# Altium PCB 400148.PcbDoc
Units mm, origin at the board's own origin, x right, y up, seen from the top; angles counter-clockwise.
Board outline 21.21 x 58.85 mm, 2 copper layers (Top Layer, Bottom Layer), stack 0.11 mm thick; 1 components, 1 nets, 0 pads, 2 vias.
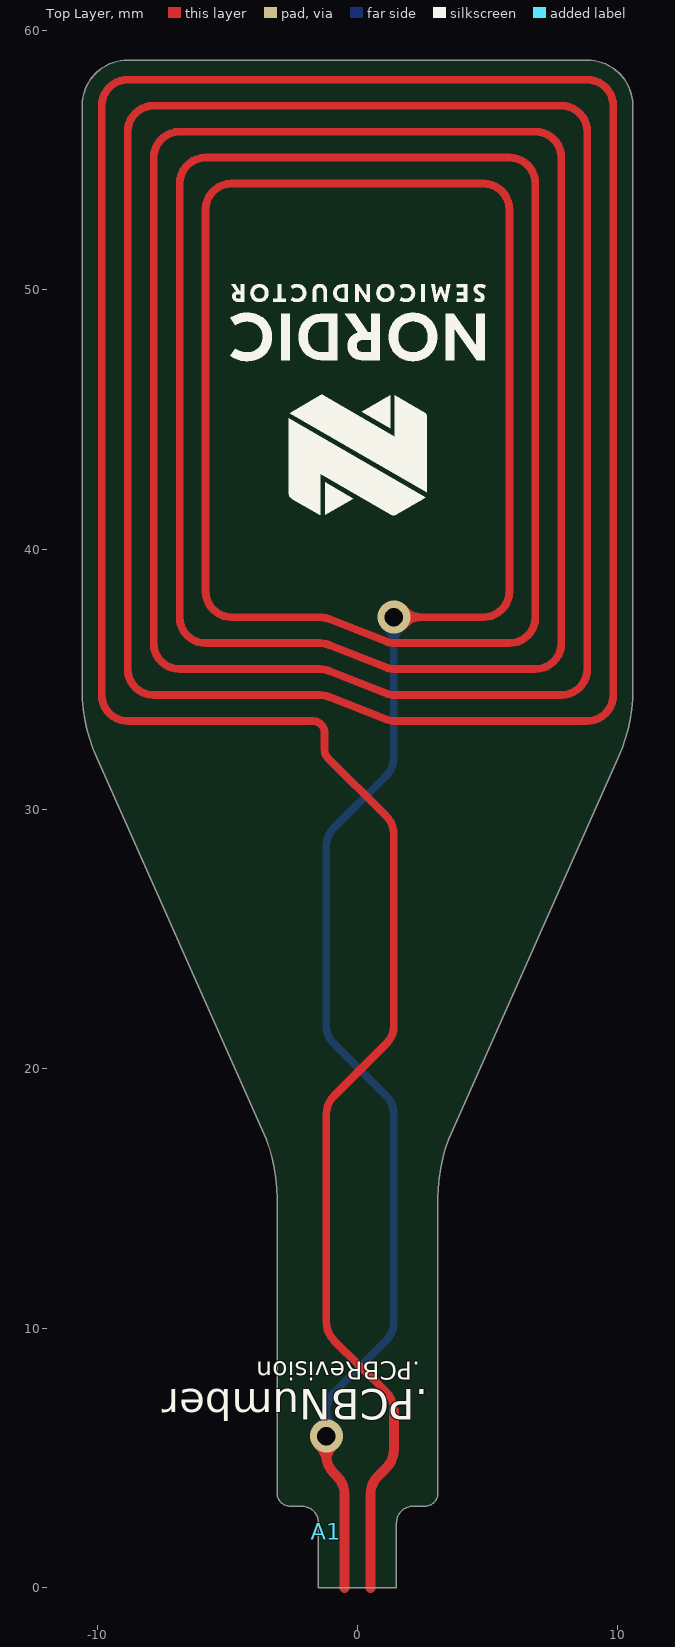
[diagram p0: Top Layer view]
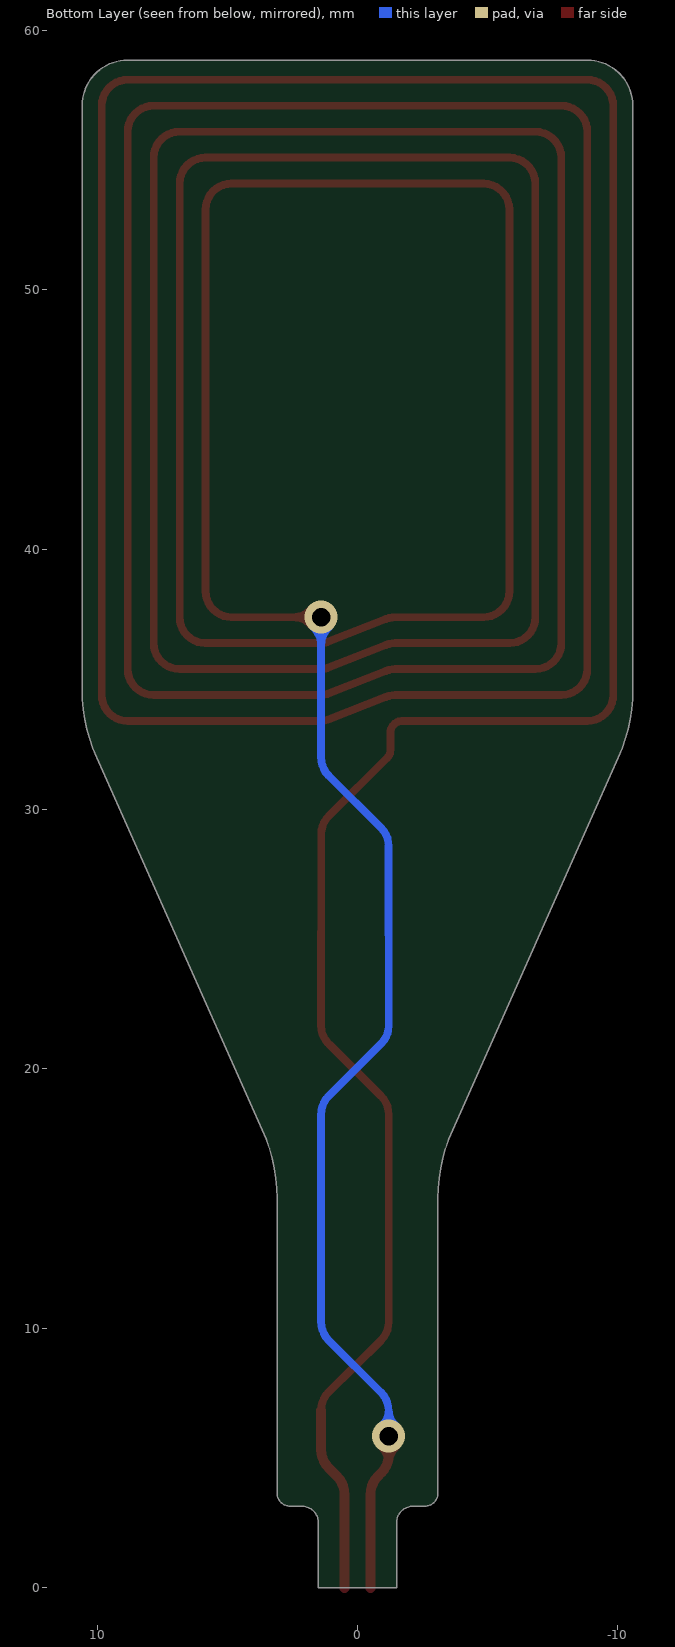
[diagram p1: Bottom Layer view, seen from below]

## Layer stack, top to bottom
Top Solder: solder mask 0.0102, Solder Resist, Dk 3.5
Top Layer: signal copper 0.03
Dielectric1: core 0.05, Polyimide (Flex), IPC-4204/1, Dk 4.8
Bottom Layer: signal copper 0.03
Bottom Solder: solder mask 0.0102, Solder Resist, Dk 3.5

## Board outline
-2.6,3.15 cw(c-2.6,3.65) -3.1,3.65 -3.1,15 ccw(c-9.6,15) -3.662,17.644 -10.045,31.98 cw(c-4.107,34.624) -10.607,34.624 -10.607,57.089 cw(c-8.85,57.089) -8.851,58.845 8.851,58.845 cw(c8.851,57.089) 10.607,57.089 10.607,34.624 cw(c4.107,34.624) 10.045,31.98 3.662,17.644 ccw(c9.6,15) 3.1,15 3.1,3.65 cw(c2.6,3.65) 2.6,3.15 2.153,3.15 ccw(c2.153,2.5) 1.503,2.5 1.503,0 -1.503,0 -1.503,2.5 ccw(c-2.153,2.5) -2.153,3.15

## Design rules (kind name [scope] priority, off if disabled: settings)
Clearance ANT_Clerance [InNet('ANT')] p1: gap=0.127 ignorepadtopadclearanceinfootprint=FALSE except(0: Arc-Hole Track-Hole SMDPad-Hole THPad-Hole Via-Hole Fill-Hole Poly-Hole Region-Hole Text-Hole)
Clearance Polygon_Clearance [(InNamedPolygon('Top_Layer-GND')) or (InNamedPolygon('Bottom_Layer-GND'))] p2: gap=0.254 ignorepadtopadclearanceinfootprint=FALSE except(0: Arc-Hole Track-Hole SMDPad-Hole THPad-Hole Via-Hole Fill-Hole Poly-Hole Region-Hole Text-Hole)
Clearance [All] p3: gap=0.152 ignorepadtopadclearanceinfootprint=FALSE except(0: Arc-Hole Track-Hole SMDPad-Hole THPad-Hole Via-Hole Fill-Hole Poly-Hole Region-Hole Text-Hole)
ComponentClearance [All] p1 off: gap=0.254 collisioncheckmode=3 verticalgap=0.254 showdistances=FALSE
DiffPairsRouting [All] p1: maxlimit=0.15 minlimit=0.15 mostfreqgap=0.15 toplayer_minwidth=0.381 toplayer_maxwidth=0.381 toplayer_prefwidth=0.381 bottomlayer_minwidth=0.381 bottomlayer_maxwidth=0.381 bottomlayer_prefwidth=0.381 substack1={64A68C17-672D-4B89-A132-CB50C114D1B8} toplayer_{64a68c17-672d-4b89-a132-cb50c114d1b8}_minwidth=0.381 toplayer_{64a68c17-672d-4b89-a132-cb50c114d1b8}_maxwidth=0.381 toplayer_{64a68c17-672d-4b89-a132-cb50c114d1b8}_prefwidth=0.381 bottomlayer_{64a68c17-672d-4b89-a132-cb50c114d1b8}_minwidth=0.381 bottomlayer_{64a68c17-672d-4b89-a132-cb50c114d1b8}_maxwidth=0.381 bottomlayer_{64a68c17-672d-4b89-a132-cb50c114d1b8}_prefwidth=0.381 maxuncoupledlength=12.7
FabricationTestPointUsage TestPointUsage [All] p1: valid=0 allowmultiple=FALSE
FabricationTestpoint Testpoint [All] p1: side=3 testpointundercomponent=TRUE minsize=1.016 maxsize=2.54 preferedsize=1.524 minholesize=0 maxholesize=1.016 preferedholesize=0.813 testpointgrid=0.025 allowsidetop=TRUE allowsidebottom=TRUE usegrid=TRUE gridtolerance=0
Height [All] p1 off: minheight=0 maxheight=25.4 prefheight=12.7
HoleSize [All] p1: absolutevalues=TRUE maxlimit=5 minlimit=0.305 maxpercent=80.000 minpercent=20.000
MinimumAnnularRing [All] p1 off: minimumring=0.152
PolygonConnect PolygonConnect_1 [isVia and innet(gnd)] p1: connectstyle=Direct reliefconductorwidth=0.254 reliefentries=4 polygonreliefangle="90 Angle" airgapwidth=0.254
PolygonConnect [All] p2: connectstyle=Relief reliefconductorwidth=0.254 reliefentries=4 polygonreliefangle="90 Angle" airgapwidth=0.254
RoutingVias [All] p1: holewidth=0.305 width=0.61 viastyle="Through Hole" minholewidth=0.305 minwidth=0.61 maxholewidth=0.711 maxwidth=1.27
ShortCircuit ShortCircuit_1 [All] p1: allowed=FALSE
ShortCircuit [InNet('N') vs InNet('P')] p2: allowed=TRUE
SilkToSolderMaskClearance SilkscreenOverComponentPads [IsPad] p1: minsilkscreentomaskgap=0.254 clearancetoexposedcopper=TRUE
SolderMaskExpansion [All] p1: expansion=0.076 istentingtop=FALSE
Width [All] p1: maxlimit=2.54 minlimit=0.152 preferedwidth=0.152 substack1={64A68C17-672D-4B89-A132-CB50C114D1B8}
22 further rules are at their usual default settings.

## Components (designator, comment, footprint, x,y, rotation, side; value= is the part's Value field where it differs from the comment)
A1 "NFC_ANT_Listener-6" NFC_ANT_Listener-6 -1.205,2.159 r90 top

## Footprints (in the part's own frame and the unit in brackets; to place one, negate y for a bottom-side part, rotate by r counter-clockwise, add the part's x,y. Pads: shape width x height; smd on the part's side, far side on the other; paste and mask are expansions set on the pad)
NFC_ANT_Listener-6 [mm]
  Top Layer lines w0.3: 51.93,3.644 ccw(c50.93,3.644) 50.93,4.644 ; 51.93,3.644 51.93,-6.056 cw(c50.93,-6.056) 50.93,-7.056 36.23,-7.056 cw(c36.23,-6.056) 35.23,-6.056 35.23,-2.606 ; 32.157,-0.12 ccw(c31.23,0.254) 32.16,-0.112 ; 33.157,-0.12 ccw(c32.23,0.254) 33.16,-0.115 ; 34.157,-0.12 ccw(c33.23,0.254) 34.16,-0.115 ; 35.157,-0.12 ccw(c34.23,0.254) 35.16,-0.115 ; 4.68,-2.606 ccw(c4.68,-1.606) 5.387,-2.313 7.373,-0.298 cw(c8.08,-1.005) 8.08,-0.006 ; 33.23,7.644 ccw(c33.23,6.644) 32.23,6.644 32.23,0.254 cw(c31.23,0.254) 32.16,-0.112 ; 33.23,7.644 53.93,7.644 ; 33.23,7.644 33.23,7.644 ; 33.23,7.644 33.23,7.644 ; 53.93,7.644 cw(c53.93,6.644) 54.93,6.644 54.93,-9.056 cw(c53.93,-9.056) 53.93,-10.056 33.23,-10.056 ; 53.93,7.644 53.93,7.644 ; 53.93,7.644 53.93,7.644 ; 53.93,7.644 53.93,7.644 ; 52.93,6.644 ccw(c52.93,5.644) 52.93,6.644 ; 52.93,6.644 cw(c52.93,5.644) 53.93,5.644 53.93,-8.056 cw(c52.93,-8.056) 52.93,-9.056 34.23,-9.056 cw(c34.23,-8.056) 33.23,-8.056 33.23,-2.665 33.23,-2.639 33.235,-2.569 33.244,-2.5 33.258,-2.432 33.276,-2.365 33.3,-2.299 34.16,-0.115 ; 52.93,6.644 52.93,6.644 ; 52.93,6.644 34.23,6.644 ccw(c34.23,5.644) 33.23,5.644 33.23,0.254 cw(c32.23,0.254) 33.161,-0.112 ; 51.93,5.644 cw(c51.93,4.644) 51.93,5.644 ; 51.93,5.644 51.93,5.644 ; 51.93,5.644 35.23,5.644 ccw(c35.23,4.644) 34.23,4.644 34.23,0.254 cw(c33.23,0.254) 34.161,-0.112 ; 51.93,5.644 cw(c51.93,4.644) 52.93,4.644 52.93,-7.056 cw(c51.93,-7.056) 51.93,-8.056 35.23,-8.056 cw(c35.23,-7.056) 34.23,-7.056 34.23,-2.665 34.23,-2.639 34.235,-2.569 34.244,-2.5 34.258,-2.432 34.276,-2.365 34.3,-2.299 35.16,-0.115 ; 50.93,4.644 ccw(c50.93,3.644) 50.93,4.644 ; 50.93,4.644 36.23,4.644 ccw(c36.23,3.644) 35.23,3.644 35.23,0.254 cw(c34.23,0.254) 35.161,-0.112 ; 50.93,4.644 50.93,4.644 ; 8.08,-0.006 8.08,-0.006 ; 8.08,-0.006 16.08,-0.006 ; 8.08,-0.006 8.08,-0.006 ; 16.08,-0.006 cw(c16.08,-1.005) 16.787,-0.298 18.773,-2.284 18.822,-2.333 ccw(c19.48,-1.674) 19.48,-2.606 26.874,-2.601 ccw(c26.874,-1.61) 27.575,-2.31 27.63,-2.256 29.796,-0.072 ; 16.08,-0.006 16.08,-0.006 ; 16.08,-0.006 16.08,-0.006 ; 16.08,-0.006 16.08,-0.006 ; 29.796,-0.072 ccw(c30.124,-0.4) 29.796,-0.072 ; 29.796,-0.072 cw(c30.124,-0.4) 30.124,0.064 30.139,0.064 30.684,0.064 30.78,0.064 ccw(c30.78,0.514) 31.23,0.514 31.23,7.594 31.23,7.645 cw(c32.23,7.645) 32.23,8.644 54.93,8.644 cw(c54.93,7.645) 55.93,7.645 55.93,-10.056 cw(c54.93,-10.056) 54.93,-11.056 32.23,-11.056 cw(c32.23,-10.056) 31.23,-10.056 ; 29.796,-0.072 29.796,-0.072 ; 29.796,-0.072 29.796,-0.072 ; 32.161,-0.112 31.3,-2.299 31.276,-2.365 31.258,-2.432 31.244,-2.5 31.235,-2.569 31.23,-2.639 31.23,-2.665 31.23,-10.056 ; 33.161,-0.112 cw(c32.23,0.254) 33.16,-0.115 ; 33.161,-0.112 33.16,-0.115 ; 34.161,-0.112 cw(c33.23,0.254) 34.16,-0.115 ; 34.161,-0.112 34.16,-0.115 ; 35.161,-0.112 cw(c34.23,0.254) 35.16,-0.115 ; 35.161,-0.112 35.16,-0.115 ; 33.16,-0.115 cw(c32.23,0.254) 33.16,-0.115 ; 33.16,-0.115 33.16,-0.115 ; 34.16,-0.115 cw(c33.23,0.254) 34.16,-0.115 ; 34.16,-0.115 34.16,-0.115 ; 35.16,-0.115 cw(c34.23,0.254) 35.16,-0.115 ; 35.16,-0.115 35.16,-0.115 ; 33.16,-0.115 32.3,-2.299 32.276,-2.365 32.258,-2.432 32.244,-2.5 32.235,-2.569 32.23,-2.639 32.23,-2.665 32.23,-9.056 ccw(c33.23,-9.056) 33.23,-10.056 ; 31.23,-10.056 31.23,-10.056 ; 31.23,-10.056 31.23,-10.056 ; 33.23,-10.056 33.23,-10.056
  Bottom Layer lines w0.3: 3.68,-0.006 3.683,-0.006 4.652,-0.006 ; 4.656,-0.006 cw(c4.656,-1.03) 5.38,-0.306 7.373,-2.313 ccw(c8.08,-1.606) 8.08,-2.606 ; 35.23,-2.606 35.154,-2.606 29.83,-2.606 cw(c29.83,-1.606) 29.123,-2.313 27.123,-0.299 ccw(c26.416,-1.006) 26.416,-0.006 ; 26.416,-0.006 26.416,-0.006 ; 26.416,-0.006 26.416,-0.006 ; 26.416,-0.006 26.416,-0.006 ; 26.416,-0.006 19.48,-0.006 ccw(c19.48,-0.937) 18.822,-0.278 18.773,-0.327 16.787,-2.313 cw(c16.08,-1.606) 16.08,-2.606 ; 26.416,-0.006 26.416,-0.006 ; 8.08,-2.606 16.08,-2.606 ; 8.08,-2.606 8.08,-2.606 ; 16.08,-2.606 16.08,-2.606 ; 16.08,-2.606 16.08,-2.606

## Part data
A1: "NFC Antenna Listener-6"

## Via types
v1: diameter 1.27, hole 0.711, Top Layer to Bottom Layer, tented both sides, 2 vias

## Nets (pads, with @x,y where several pads share a name; then routed paths per layer and width w, separated by ;. In a path a pad name is that pad's centre, name@x,y a point inside that pad or via, vN(x,y) a via of type N, cw(c..) or ccw(c..) an arc to the next point about the centre after c; other vN are vias at no path point)
ANT:  | length 13.5
  Top Layer w0.381: v1@-1.294,5.467 v1@-1.294,5.842 ; v1@-1.205,5.842 -1.205,5.129 ccw(c-0.205,5.129) -0.912,4.422 -0.792,4.302 cw(c-1.499,3.595) -0.499,3.595 -0.5,0 ; 0.499,3.595 cw(c1.499,3.595) 0.792,4.302 1.107,4.617 ccw(c0.4,5.324) 1.4,5.324 1.4,6.839 ; 0.5,0 0.5,3.595
  other v1: -1.2,5.842 1.4,37.389

## Polygon pours and split planes (outlines as drawn)
no net on Mechanical 5 (hatched Horizontal grid 0.025 track 0.025): 1.49,0.013 -1.49,0.013 -1.49,2.54 -1.49,2.541 -1.501,2.653 -1.532,2.763 -1.58,2.865 -1.646,2.957 -1.727,3.037 -1.82,3.101 -1.923,3.149 -2.032,3.178 -2.145,3.188 -2.621,3.188 -2.629,3.186 -2.636,3.188 -2.728,3.196 -2.817,3.223 -2.898,3.266 -2.969,3.324 -3.028,3.395 -3.072,3.477 -3.099,3.565 -3.108,3.658 -3.108,4.747 3.082,4.747 3.082,3.659 3.074,3.568 3.048,3.481 3.005,3.4 2.948,3.329 2.879,3.27 2.799,3.226 2.712,3.198 2.621,3.187 2.619,3.187 2.613,3.188 2.147,3.188 2.034,3.178 1.924,3.149 1.821,3.101 1.728,3.037 1.647,2.957 1.581,2.865 1.532,2.762 1.501,2.653 1.49,2.541
no net on Mechanical 6 (hatched Horizontal grid 0.025 track 0.025): 1.49,0.013 -1.49,0.013 -1.49,2.54 -1.49,2.541 -1.501,2.653 -1.532,2.763 -1.58,2.865 -1.646,2.957 -1.727,3.037 -1.82,3.101 -1.923,3.149 -2.032,3.178 -2.145,3.188 -2.621,3.188 -2.629,3.186 -2.636,3.188 -2.728,3.196 -2.817,3.223 -2.898,3.266 -2.969,3.324 -3.028,3.395 -3.072,3.477 -3.099,3.565 -3.108,3.658 -3.108,4.747 3.082,4.747 3.082,3.659 3.074,3.568 3.048,3.481 3.005,3.4 2.948,3.329 2.879,3.27 2.799,3.226 2.712,3.198 2.621,3.187 2.619,3.187 2.613,3.188 2.147,3.188 2.034,3.178 1.924,3.149 1.821,3.101 1.728,3.037 1.647,2.957 1.581,2.865 1.532,2.762 1.501,2.653 1.49,2.541

## Silkscreen, mask and mechanical layers (free items; w line width, h text height)
Top Overlay:
  drawing of 23 lines, arcs and shapes, not listed
  text ".PCBRevision" at 2.422,8.948 h1.2 r180
  text ".PCBNumber" at 2.726,8.055 h2.03 r180
Top Solder:
  lines w0.35: -1,0 -1,3.5 ; -0.5,0 -0.5,3.5 ; 0,0 0,3.5 ; 0.5,0 0.5,3.5 ; 1,0 1,3.5
Mechanical 1:
  lines w0.152: -10.607,34.624 ccw(c-4.107,34.624) -10.045,31.98 -3.662,17.644 cw(c-9.6,15) -3.1,15 -3.1,3.65 ccw(c-2.6,3.65) -2.6,3.15 -2.153,3.15 cw(c-2.153,2.5) -1.503,2.5 -1.503,0 1.503,0 1.503,2.5 cw(c2.153,2.5) 2.153,3.15 2.6,3.15 ccw(c2.6,3.65) 3.1,3.65 3.1,15 cw(c9.6,15) 3.662,17.644 10.045,31.98 ccw(c4.107,34.624) 10.607,34.624 10.607,57.089 ccw(c8.851,57.089) 8.851,58.845 -8.851,58.845 ccw(c-8.851,57.089) -10.607,57.089 -10.607,34.624
Mechanical 4:
  lines w0.1: 3.095,3.658 cw(c2.612,3.658) 2.587,3.175 2.155,3.175 ccw(c2.146,2.531) 1.503,2.54 1.503,0 -1.503,0 -1.503,2.54 ccw(c-2.146,2.531) -2.155,3.175 -2.612,3.175 cw(c-2.638,3.658) -3.121,3.658 -3.121,4.79 3.102,4.79 3.102,3.658
  text "STIFFENER BOTTOM SIDE. / TOTAL THICKNESS @ STIFFENER: 0.3 MM." at 3.456,0.157 h2.5
Mechanical 5:
  lines w0.75: -0.5,0 -0.5,3.5 ; 0.5,0 0.5,3.5
  text "COVER LAYER FOR FLEX ON TOP SIDE" at 3.456,0.563 h2.5
Mechanical 6:
  text "COVER LAYER FOR FLEX ON BOTTOM SIDE" at 3.456,0.563 h2.5
Mechanical 15:
  pour cut-out: 9.53,36.682 -9.53,36.682 -9.53,54.838 9.53,54.838
  pour cut-out: 7.212,39 -7.212,39 -7.212,52.521 7.212,52.521
  lines w0.125: -7.212,39 -7.212,52.521 7.212,52.521 7.212,39 -7.212,39